# EAGLE board pneumatic_control (EAGLE 6.5.0)
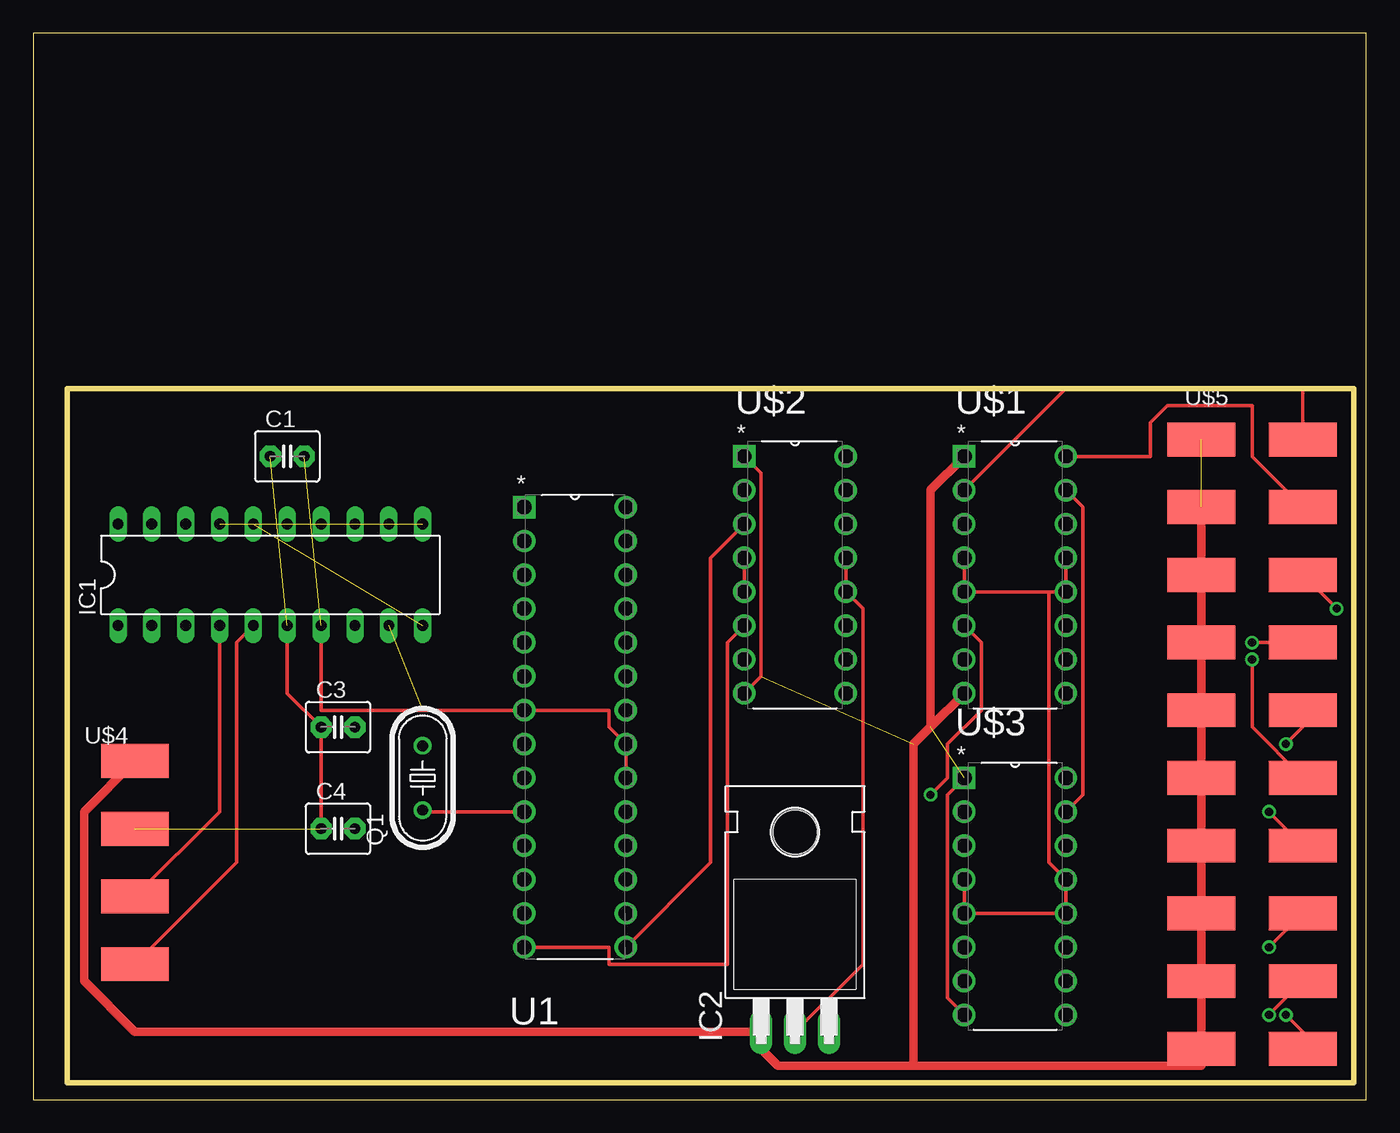
[diagram p0: board, top side]
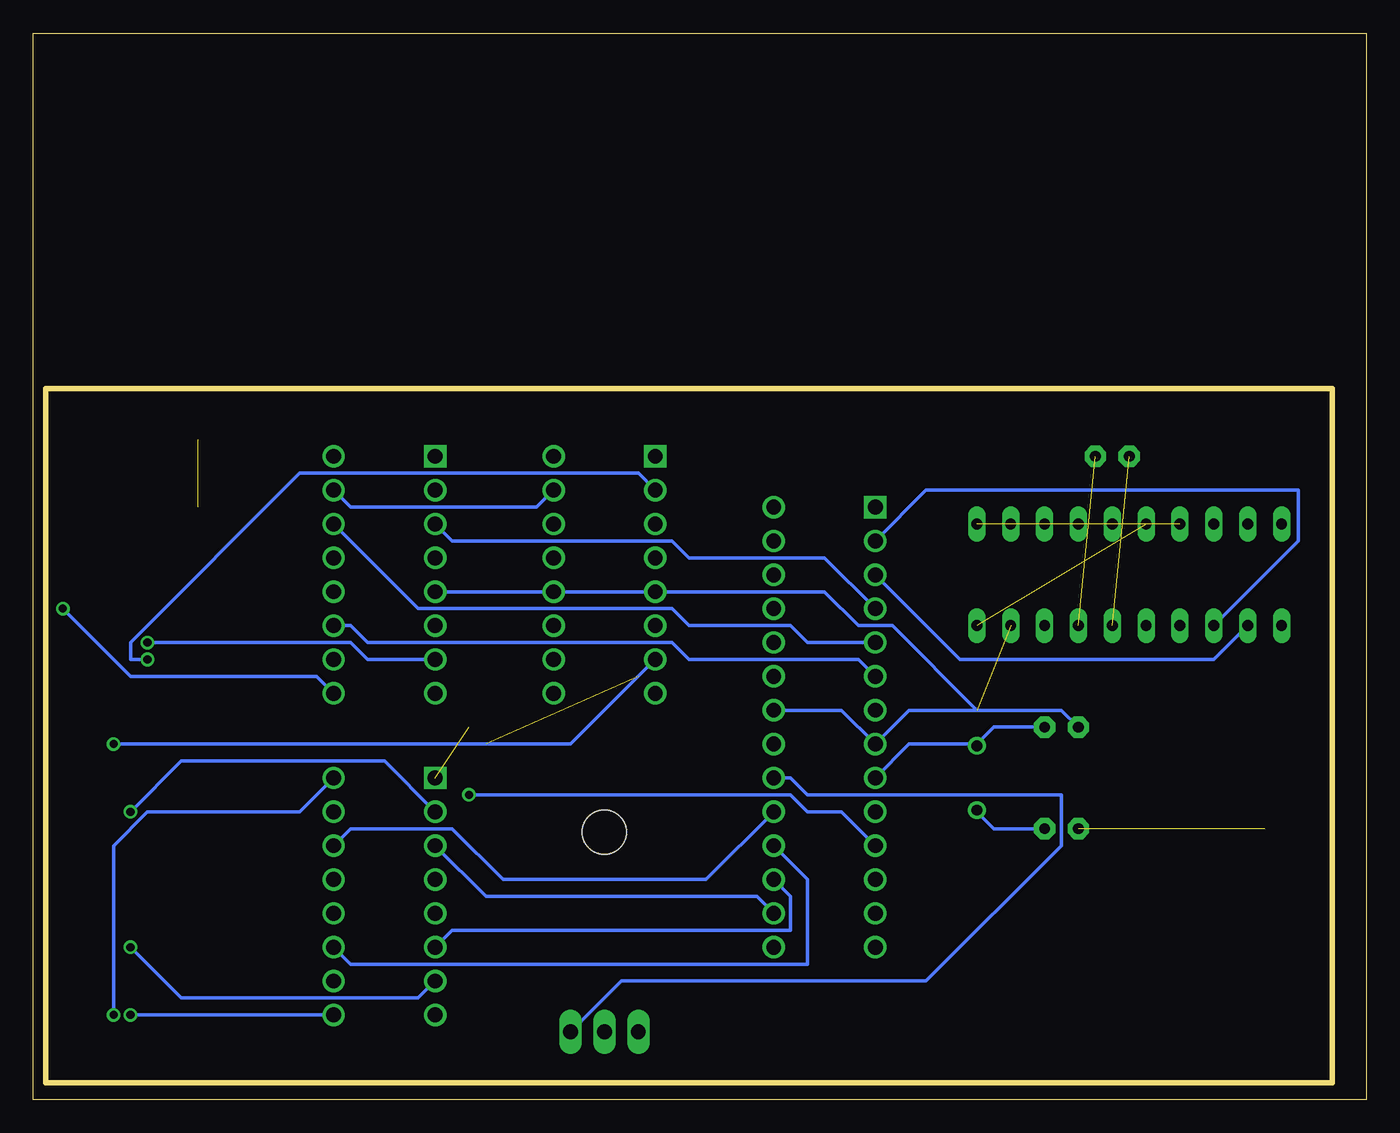
[diagram p1: board, bottom side, seen from below]

Size 100 x 80 mm. Coordinates in mm from the lower left corner, seen from the top.
Outline: 0,0 100,0 100,80 0,80 0,0
Copper layers (1*16): Top 0.035mm / dielectric 1.5mm / Bottom 0.035mm
Design rules "default *": minimum track width 10mil, minimum drill 24mil, track to track 8mil, track to pad 8mil, pad to pad 8mil, via to via 8mil, smd to smd 8mil, copper to edge 0mil, drill to drill 8mil, minimum pad ring 10mil, minimum via ring 8mil, stop-mask expansion 4mil, vias tented up to drill 0mil, thermal gap 10mil
Net classes: 1 power: width 0.635 mm

## Footprints (pad centres in the part's own frame; a part is rotated, then mirrored left to right if it is on the bottom)
C2.5-4 = drill 0.813 pad 1.6 octagon: 1 -1.27,0; 2 1.27,0
DIL20 = drill 0.813 long: 1 -11.43,-3.81; 2 -8.89,-3.81; 3 -6.35,-3.81; 4 -3.81,-3.81; 5 -1.27,-3.81; 6 1.27,-3.81; 7 3.81,-3.81; 8 6.35,-3.81; 9 8.89,-3.81; 10 11.43,-3.81; 11 11.43,3.81; 12 8.89,3.81; 13 6.35,3.81; 14 3.81,3.81; 15 1.27,3.81; 16 -1.27,3.81; 17 -3.81,3.81; 18 -6.35,3.81; 19 -8.89,3.81; 20 -11.43,3.81
TO220H = drill 1.118 long: 1 -2.54,-10.16; 2 0,-10.16; 3 2.54,-10.16 | hole 3.302: 0,4.826
HC49U-V = drill 0.813: 1 -2.413,0; 2 2.413,0
DIP254P762X457-28 = drill 1.118 square: 1 -7.62,33.02 | drill 1.118: 2 -7.62,30.48; 3 -7.62,27.94; 4 -7.62,25.4; 5 -7.62,22.86; 6 -7.62,20.32; 7 -7.62,17.78; 8 -7.62,15.24; 9 -7.62,12.7; 10 -7.62,10.16; 11 -7.62,7.62; 12 -7.62,5.08; 13 -7.62,2.54; 14 -7.62,0; 15 0,0; 16 0,2.54; 17 0,5.08; 18 0,7.62; 19 0,10.16; 20 0,12.7; 21 0,15.24; 22 0,17.78; 23 0,20.32; 24 0,22.86; 25 0,25.4; 26 0,27.94; 27 0,30.48; 28 0,33.02
DIP254P762X510-16 = drill 1.118 square: 1 -7.62,17.78 | drill 1.118: 2 -7.62,15.24; 3 -7.62,12.7; 4 -7.62,10.16; 5 -7.62,7.62; 6 -7.62,5.08; 7 -7.62,2.54; 8 -7.62,0; 9 0,0; 10 0,2.54; 11 0,5.08; 12 0,7.62; 13 0,10.16; 14 0,12.7; 15 0,15.24; 16 0,17.78
SOLDER-CON = smd 5.08 x 2.54: 12V 2.54,6.35; GND 2.54,1.27; RX 2.54,-3.81; TX 2.54,-8.89
SOLDER-CON-20 = smd 5.08 x 2.54: P$11 -5.08,46.99; P$12 -5.08,41.91; P$13 -5.08,36.83; P$14 -5.08,31.75; P$15 -5.08,26.67; P$16 -5.08,21.59; P$17 -5.08,16.51; P$18 -5.08,11.43; P$19 -5.08,6.35; P$20 -5.08,1.27; S1 2.54,46.99; S2 2.54,41.91; S3 2.54,36.83; S4 2.54,31.75; S5 2.54,26.67; S6 2.54,21.59; S7 2.54,16.51; S8 2.54,11.43; S9 2.54,6.35; S10 2.54,1.27

## Placement (x,y rotation side)
C1  [C2.5-4]  19.05,48.26 0 top
C3  [C2.5-4]  22.86,27.94 0 top
C4  [C2.5-4]  22.86,20.32 0 top
IC1  MAX233  [DIL20]  17.78,39.37 0 top
IC2  LM340H-15  [TO220H]  57.15,15.24 0 top
Q1  [HC49U-V]  29.21,24.13 90 top
U1  ATMEGA328P-PU  [DIP254P762X457-28]  44.45,11.43 0 top
U$1  ULN2066B  [DIP254P762X510-16]  77.47,30.48 0 top
U$2  ULN2066B  [DIP254P762X510-16]  60.96,30.48 0 top
U$3  ULN2066B  [DIP254P762X510-16]  77.47,6.35 0 top
U$4  SOLDER-CON-4  [SOLDER-CON]  5.08,19.05 0 top
U$5  SOLDER-CON-20  [SOLDER-CON-20]  92.71,2.54 0 top

## Library data of the parts
C1 C3 C4 = capacitor-wima
IC1 = maxim; MPN: MAX233ACPP+G36; OC_FARNELL: 1593332; OC_NEWARK: 89K3459
IC2 = linear
Q1 = crystal; OC_FARNELL: 1666969; OC_NEWARK: unknown
U1 = Atmel_By_element14_Batch_1-00; MPN: ATMEGA328P-PU; OC_FARNELL: 1715487; OC_NEWARK: 15R0268; PACKAGE: PDIP-28; SUPPLIER: Atmel
U$1-U$3 = ST Microelctronics_By_element14_Batch_1
U$4 U$5 = con-solderpad

## Nets
GND: C1.1 C3.1 C4.1 IC1.6 IC1.9 IC2.2 U1.8 U1.22 U$1.4 U$1.5 U$1.12 U$1.13 U$2.4 U$2.5 U$2.12 U$2.13 U$3.4 U$3.5 U$3.12 U$3.13 U$4.GND
N$1: C3.2 Q1.2 U1.9
N$2: C4.2 Q1.1 U1.10
N$3: U1.14 U$2.6
N$4: U1.15 U$2.3
N$5: U1.16 U$3.3
N$6: U1.17 U$3.6
N$7: U1.18 U$3.11
N$8: U1.19 U$3.14
N$9: U1.4 U$1.3
N$10: U1.5 U$1.14
N$11: U1.6 U$1.11
N$12: U1.11 U$1.6
N$13: IC1.12 IC1.17
N$14: IC1.10 IC1.16
N$15: IC1.11 IC1.15
N$16: IC1.2 U1.3
N$17: IC1.3 U1.2
N$18: IC1.4 U$4.RX
N$19: IC1.5 U$4.TX
N$20: U$1.2 U$5.S1
N$21: U$1.16 U$5.S2
N$22: U$1.9 U$5.S3
N$23: U$1.7 U$5.S4
N$24: U$2.7 U$5.S5
N$25: U$2.2 U$5.S6
N$26: U$3.2 U$5.S7
N$27: U$3.7 U$5.S8
N$28: U$3.9 U$5.S9
N$29: U$3.16 U$5.S10
N$30 [power]: IC2.1 U$1.1 U$1.8 U$2.1 U$2.8 U$3.1 U$3.8 U$4.12V U$5.P$11 U$5.P$12 U$5.P$13 U$5.P$14 U$5.P$15 U$5.P$16 U$5.P$17 U$5.P$18 U$5.P$19 U$5.P$20
VCC: C1.2 IC1.7 IC2.3 U1.7 U1.20 U1.21
VS: U$1.15 U$2.15 U$3.15

## Tracks (layer width: path | path; a pad name or v marks a point on that pad's centre or on a via)
GND  (3 unrouted)
  Top 0.254: U$3.4 U$3.5 U$3.12 U$3.13 76.2,17.78 76.2,38.1 | U$1.4 U$1.5 76.2,38.1 | U$1.13 U$1.12 76.2,38.1 | U$2.4 U$2.5 | IC2.2 62.23,10.16 62.23,36.83 U$2.12 U$2.13 | C4.1 C3.1 19.05,30.48 IC1.6
  Bottom 0.254: U$1.5 U$2.12 U$2.5 40.64,38.1 38.1,35.56 35.56,35.56 29.21,29.21 | U1.22 39.37,29.21 U1.8 34.29,29.21 29.21,29.21 | 29.21,29.21 22.86,29.21 C3.1
N$1
  Bottom 0.254: 29.21,26.67 27.94,27.94 C3.2 | U1.9 34.29,26.67 29.21,26.67 | 29.21,26.67 Q1.2
N$2
  Top 0.254: U1.10 29.21,21.59 Q1.1
  Bottom 0.254: C4.2 27.94,20.32 29.21,21.59 Q1.1
N$3
  Top 0.254: U1.14 43.18,11.43 43.18,10.16 52.07,10.16 52.07,34.29 U$2.6
N$4
  Top 0.254: U1.15 50.8,17.78 50.8,40.64 U$2.3
N$5
  Bottom 0.254: U1.16 45.72,15.24 66.04,15.24 U$3.3
N$6
  Bottom 0.254: U1.17 43.18,15.24 43.18,12.7 68.58,12.7 U$3.6
N$7
  Bottom 0.254: U1.18 41.91,16.51 41.91,10.16 76.2,10.16 U$3.11
N$8
  Bottom 0.254: U1.19 49.53,16.51 64.77,16.51 68.58,20.32 76.2,20.32 U$3.14
N$9
  Bottom 0.254: U1.4 40.64,40.64 50.8,40.64 52.07,41.91 68.58,41.91 U$1.3
N$10
  Bottom 0.254: U1.5 41.91,34.29 43.18,35.56 50.8,35.56 52.07,36.83 71.12,36.83 U$1.14
N$11
  Bottom 0.254: U1.6 38.1,33.02 50.8,33.02 52.07,34.29 74.93,34.29 76.2,35.56 U$1.11
N$12  (via drill 0.61)
  Top 0.254: v67.31,22.86 68.58,24.13 68.58,26.67 71.12,29.21 71.12,34.29 U$1.6
  Bottom 0.254: U1.11 39.37,21.59 41.91,21.59 43.18,22.86 v67.31,22.86
N$13  (1 unrouted)
N$14  (1 unrouted)
N$15  (1 unrouted)
N$16
  Bottom 0.254: IC1.2 11.43,33.02 30.48,33.02 U1.3
N$17
  Bottom 0.254: IC1.3 5.08,41.91 5.08,45.72 33.02,45.72 U1.2
N$18
  Top 0.254: IC1.4 13.97,21.59 U$4.RX
N$19
  Top 0.254: IC1.5 15.24,34.29 15.24,17.78 U$4.TX
N$20
  Top 0.254: U$1.2 77.47,53.34 95.25,53.34 U$5.S1
N$21
  Top 0.254: U$1.16 83.82,48.26 83.82,50.8 85.09,52.07 91.44,52.07 91.44,48.26 U$5.S2
N$22  (via drill 0.61)
  Top 0.254: U$5.S3 v97.79,36.83
  Bottom 0.254: U$1.9 78.74,31.75 92.71,31.75 v97.79,36.83
N$23  (via drill 0.61)
  Top 0.254: U$5.S4 v91.44,34.29
  Bottom 0.254: U$1.7 74.93,33.02 76.2,34.29 v91.44,34.29
N$24  (via drill 0.61)
  Top 0.254: v93.98,26.67 95.25,27.94 U$5.S5
  Bottom 0.254: U$2.7 59.69,26.67 v93.98,26.67
N$25  (via drill 0.61)
  Top 0.254: v91.44,33.02 91.44,27.94 U$5.S6
  Bottom 0.254: U$2.2 54.61,46.99 80.01,46.99 92.71,34.29 92.71,33.02 v91.44,33.02
N$26  (via drill 0.61)
  Top 0.254: U$5.S7 v92.71,21.59
  Bottom 0.254: U$3.2 73.66,25.4 88.9,25.4 v92.71,21.59
N$27  (via drill 0.61)
  Top 0.254: U$5.S8 v92.71,11.43
  Bottom 0.254: U$3.7 71.12,7.62 88.9,7.62 v92.71,11.43
N$28  (via drill 0.61)
  Top 0.254: U$5.S9 v92.71,6.35
  Bottom 0.254: v92.71,6.35 U$3.9
N$29  (via drill 0.61)
  Top 0.254: v93.98,6.35 95.25,5.08 U$5.S10
  Bottom 0.254: U$3.16 80.01,21.59 91.44,21.59 93.98,19.05 v93.98,6.35
N$30  (3 unrouted)
  Top 0.254: U$3.8 68.58,7.62 68.58,22.86 U$3.1 | U$2.8 54.61,31.75 54.61,46.99 U$2.1
  Top 0.635: U$5.P$12 U$5.P$13 U$5.P$14 U$5.P$15 U$5.P$16 U$5.P$17 U$5.P$18 U$5.P$19 U$5.P$20 87.63,2.54 66.04,2.54 | 66.04,2.54 55.88,2.54 54.61,3.81 IC2.1 7.62,5.08 3.81,8.89 3.81,21.59 U$4.12V | 67.31,27.94 66.04,26.67 66.04,2.54 | 67.31,27.94 U$1.8 | U$1.1 67.31,45.72 67.31,27.94
VCC  (1 unrouted)
  Top 0.254: IC1.7 21.59,29.21 U1.7 43.18,29.21 43.18,27.94 U1.21 U1.20
  Bottom 0.254: IC2.3 55.88,8.89 33.02,8.89 22.86,19.05 22.86,22.86 41.91,22.86 43.18,24.13 U1.20
VS
  Top 0.254: U$3.15 78.74,22.86 78.74,44.45 U$1.15
  Bottom 0.254: U$2.15 62.23,44.45 76.2,44.45 U$1.15